# Altium PCB 1025-one.PcbDoc
Units mil, origin at the board's own origin, x right, y up, seen from the top; angles counter-clockwise.
Board outline 964.57 x 3647.49 mil, 2 copper layers (Top Layer, Bottom Layer); 26 components, 51 nets, 79 pads, 26 vias.
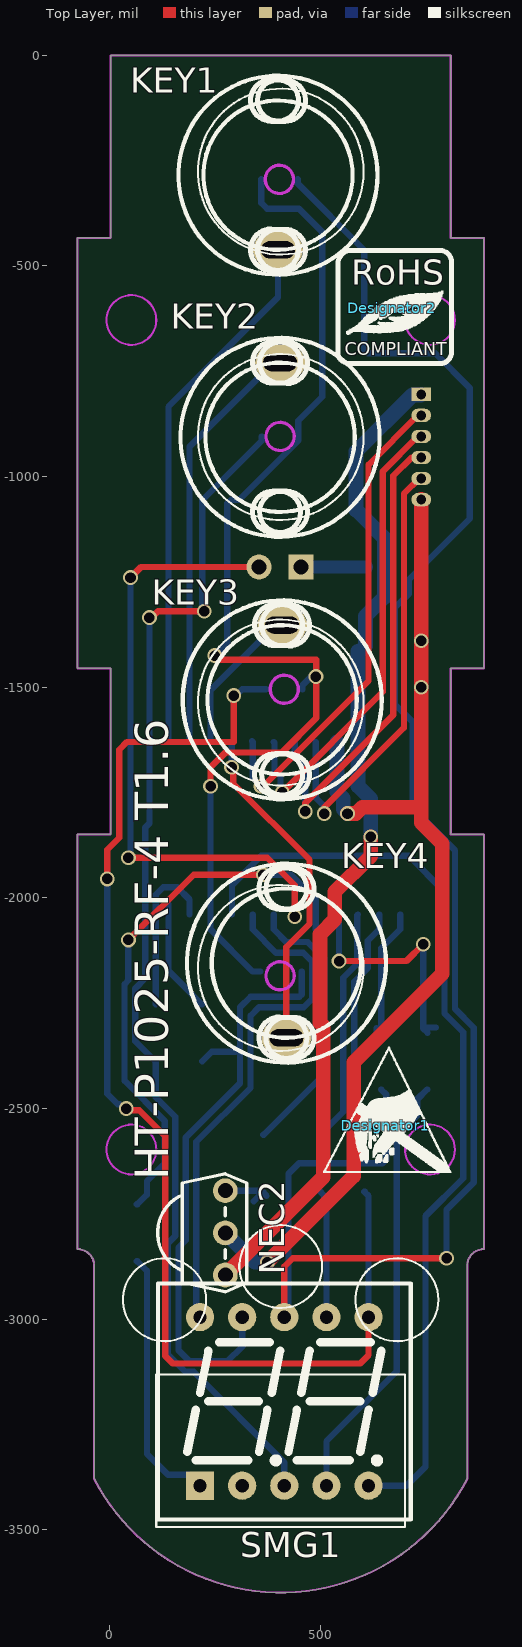
[diagram p0: Top Layer view]
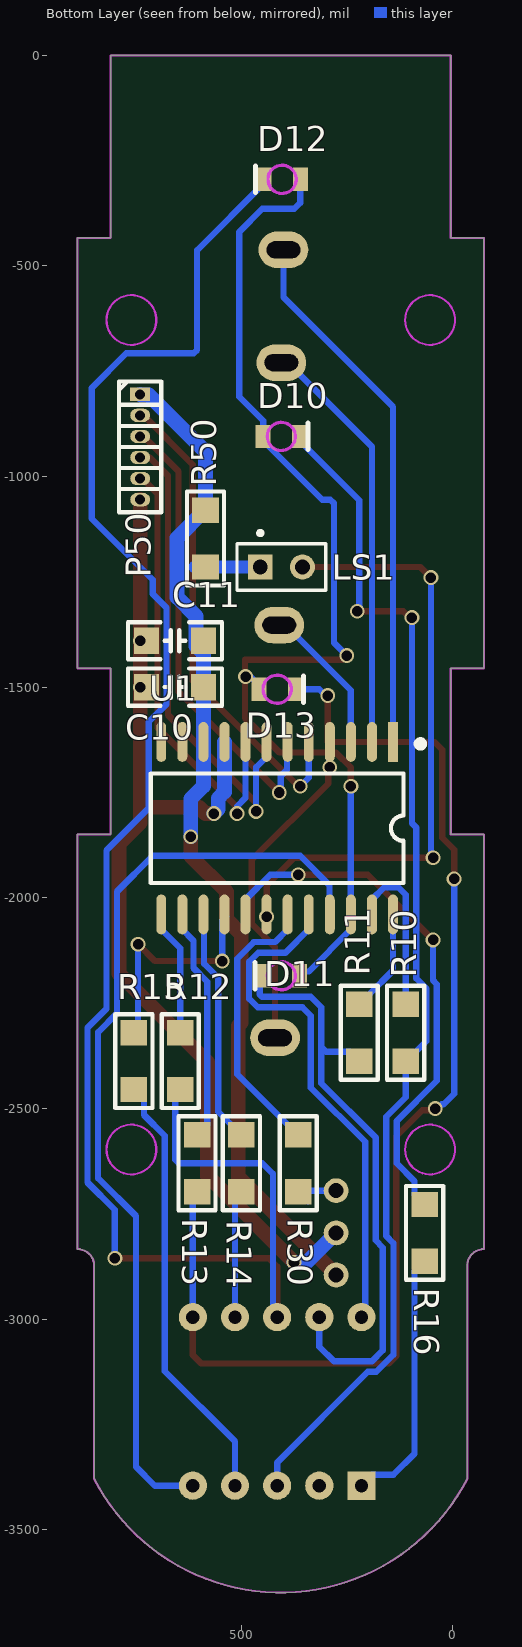
[diagram p1: Bottom Layer view, seen from below]
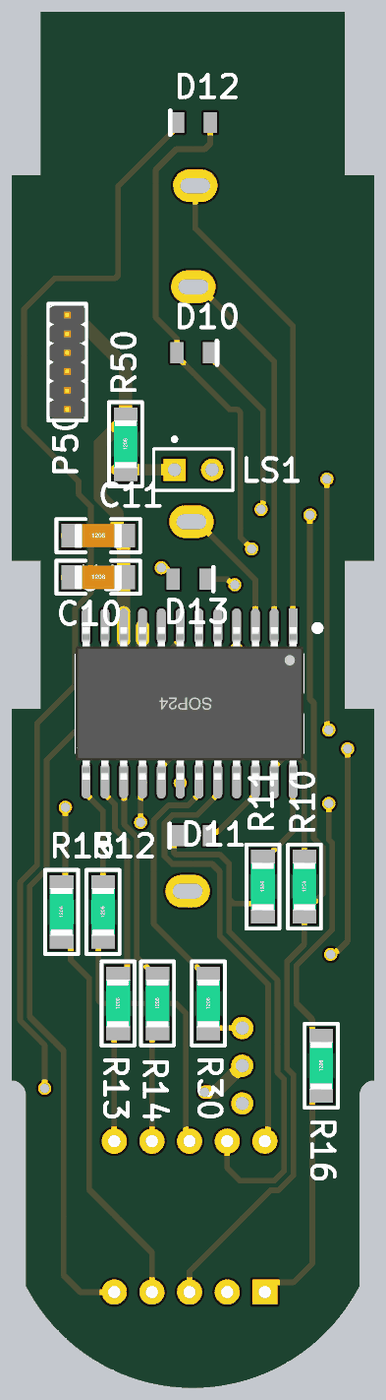
[diagram p2: 3D render of the assembled board from below, using the file's embedded part models]

## Layer stack, top to bottom
Top Solder: solder mask 0.4, Solder Resist, Dk 3.5
Top Layer: signal copper 1.4
Dielectric 1: dielectric 12.6, FR-4, Dk 4.8
Bottom Layer: signal copper 1.4
Bottom Solder: solder mask 0.4, Solder Resist, Dk 3.5

## Board outline
-36.41,-3378.37 -36.41,-2872.9 ccw(c-75.78,-2872.9) -75.78,-2833.53 -75.78,-1849.28 2.96,-1849.28 2.96,-1455.58 -75.78,-1455.58 -75.78,-434.1 2.96,-434.1 2.96,-1.03 810.05,-1.03 810.05,-434.1 888.79,-434.1 888.79,-1455.58 810.05,-1455.58 810.05,-1849.28 888.79,-1849.28 888.79,-2833.53 ccw(c888.79,-2872.9) 849.42,-2872.9 849.42,-3378.37 cw(c406.51,-3150.63)

## Design rules (kind name [scope] priority, off if disabled: settings)
Clearance [All] p1: gap=10 ignorepadtopadclearanceinfootprint=FALSE
ComponentClearance [All] p1: gap=0 collisioncheckmode=3 verticalgap=0 showdistances=FALSE
HoleSize [All] p1: absolutevalues=TRUE maxlimit=100 minlimit=12 maxpercent=80.000 minpercent=20.000
PlaneConnect [All] p1: planeconnectstyle=Direct reliefexpansion=20 reliefentries=4 reliefconductorwidth=10 reliefairgap=10
PolygonConnect [All] p1: connectstyle=Direct reliefconductorwidth=10 reliefentries=4 polygonreliefangle="90 Angle" airgapwidth=10
RoutingVias [All] p1: holewidth=28 width=50 viastyle="Through Hole" minholewidth=15 minwidth=20 maxholewidth=25 maxwidth=35
SilkToSilkClearance [All] p1: silktosilkclearance=0
SilkToSolderMaskClearance [IsPad] p1: minsilkscreentomaskgap=0 clearancetoexposedcopper=TRUE
SolderMaskExpansion [All] p1: expansion=6
Width [All] p1: maxlimit=100 minlimit=10 preferedwidth=30
25 further rules are at their usual default settings.

## Classes and differential pairs
component class 1025-A: C10 C11 D10 D11 D12 D13 KEY1 KEY2 KEY3 KEY4 LS1 NEC2 P50 R10 R11 R12 R13 R14 R15 R16 R30 R50 SMG1 U1

## Components (designator, comment, footprint, x,y, rotation, side; value= is the part's Value field where it differs from the comment)
C10 "Cap" "C 1206_M" 657.5,-1500 r180 bottom value=10uF
C11 "Cap" "C 1206_M" 657.5,-1390 r180 bottom value=0.1uF
D10 "LED0" 0805-FLED#1 405,-905 r0 bottom
D11 "LED0" 0805-FLED#2 405,-2185 r180 bottom
D12 "LED0" 0805-FLED#1 403.31,-295 r180 bottom
D13 "LED0" 0805-FLED#1 415,-1505 r0 bottom
Designator1 "Comment" ICO1 655,-2540 r0 top
Designator2 "Comment" ICO4 670,-600 r0 top
KEY1 "TOUCH" KEY-T9-2 400,-285 r180 top
KEY2 "TOUCH" KEY-T9-2 405,-907.17 r0 top
KEY3 "TOUCH" KEY-T9-2 410,-1530 r0 top
KEY4 "TOUCH" KEY-T9-2 420,-2155 r180 top
LS1 "Speaker" PIN2 455,-1215 r180 bottom
NEC2 "JSI838" HS0038B 275,-2795 r270 top
P50 "Header 6" HDR1.27-LI-6P 740,-930 r270 bottom
R10 "Res2" "R 1206-HP_M" 110,-2320 r90 bottom value=201
R11 "Res2" "R 1206-HP_M" 220,-2320 r90 bottom value=201
R12 "Res2" "R 1206-HP_M" 645,-2387.5 r90 bottom value=201
R13 "Res2" "R 1206-HP_M" 605,-2630 r90 bottom value=201
R14 "Res2" "R 1206-HP_M" 500,-2630 r90 bottom value=201
R15 "Res2" "R 1206-HP_M" 755,-2387.5 r90 bottom value=201
R16 "Res2" "R 1206-HP_M" 65,-2795 r90 bottom value=201
R30 "Res2" "R 1206-HP_M" 365,-2630 r90 bottom value=1K
R50 "Res2" "R 1206-HP_M" 585,-1147.5 r90 bottom value=4.7K
SMG1 "3621A" "SMG 0.36-2P" 415,-3195 r0 top
U1 "YX23F01CB_24" SOP24_M 415,-1834.72 r270 bottom

## Footprints (in the part's own frame and the unit in brackets; to place one, negate y for a bottom-side part, rotate by r counter-clockwise, add the part's x,y. Pads: shape width x height; smd on the part's side, far side on the other; paste and mask are expansions set on the pad)
0805-FLED#1 [mm]
  rect 0.9x1.4 smd: 1(-1.1,0) 2+(1.1,0)
  Keep-Out Layer circle w0.2: c0,0 r0.85
  silkscreen extent -1.6,-0.8 -1.6,0.8, body extent -1.02,-0.45 1.04,0.46
0805-FLED#2 [mm]
  rect 0.9x1.4 smd: 1(-1.016,0) 2+(1.1,0)
  Keep-Out Layer circle w0.2: c0,0 r0.85
  silkscreen extent -1.6,-0.8 -1.6,0.8, body extent -1.05,-0.45 1.02,0.45
"C 1206_M" [mil] "无极性贴片电容"
  rect 60x62.99 smd: 1(-67.5,0) 2(67.5,0)
  silkscreen extent -112,-44 112,44, body extent -63,-32 63,32, height 48
HDR1.27-LI-6P [mm] "直插，脚距：1.27mm"
  rect 0.8x1.2 hole 0.6: 1(-3.175,0)
  oval 0.8x1.2 hole 0.6: 2(-1.905,0) 3(-0.635,0) 4(0.635,0) 5(1.905,0) 6(3.175,0)
  silkscreen extent -3.94,-1.27 3.94,1.27, body extent -3.81,-1.2 3.81,1.2, height 4.48
HS0038B [mm] "红外接收头"
  round 1.5 hole 0.9: 1(-2.54,0) 2(0,0) 3(2.54,0)
  silkscreen extent -3.56,-4.08 3.56,1.3
ICO1 [mil] "@sucaita.com 素材塔"
  silkscreen extent -148,-111 156,187
ICO4 [mil] "@sucaita.com 素材塔"
  silkscreen extent -128,-132 142,136
KEY-T9-2 [mm]
  oval 3x2.2 hole 2.032 slot 1.016 at 90 deg: 1(0,4.5)
  silkscreen extent -6,-6 6,6
PIN2 [mm] "Photosensitive Diode; 2 Leads"
  rect 1.5x1.5 hole 0.9: 1(0,0)
  round 1.5 hole 0.9: 2(2.54,0)
  silkscreen extent -1.4,-1.4 3.94,2.17
"R 1206-HP_M" [mil] "1/4W高精度贴片电阻                    @sucaita.com 素材塔"
  rect 60x62.99 smd: 1(-67.5,0) 2(67.5,0)
  silkscreen extent -112,-44 112,44, body extent -63,-31 63,32, height 22
"SMG 0.36-2P" [mm] "15*14*7.2mm(长宽厚)"
  rect 1.7x1.7 hole 0.8: 1(-5.08,-5.08)
  round 1.7 hole 0.8: 2(-2.54,-5.08) 3(0,-5.08) 4(2.54,-5.08) 5(5.08,-5.08) 6(5.08,5.08) 7(2.54,5.08) 8(0,5.08) 9(-2.54,5.08) 10(-5.08,5.08)
  silkscreen extent -7.62,-7.11 7.62,7.11, body extent -7.5,-7 7.5,7, height 7.2
SOP24_M [mm] "15.4*10.6*2.6mm（长宽高）"
  rect 2.4x0.6 smd: 1(-5.2,6.985)
  oval 2.4x0.6 smd: 2(-5.2,5.715) 3(-5.2,4.445) 4(-5.2,3.175) 5(-5.2,1.905) 6(-5.2,0.635) 7(-5.2,-0.635) 8(-5.2,-1.905) 9(-5.2,-3.175) 10(-5.2,-4.445) 11(-5.2,-5.715) 12(-5.2,-6.985) 13(5.2,-6.985) 14(5.2,-5.715) 15(5.2,-4.445) 16(5.2,-3.175) 17(5.2,-1.905) 18(5.2,-0.635) 19(5.2,0.635) 20(5.2,1.905) 21(5.2,3.175) 22(5.2,4.445) 23(5.2,5.715) 24(5.2,6.985)
  silkscreen extent -5.23,-7.62 3.3,8.79, body extent -5.15,-7.7 5.15,7.7, height 2.7

## Part data
C10 C11: "Capacitor", LatestRevisionDate=17-Jul-2002, LatestRevisionNote="Re-released for DXP Platform.", PackageDescription="Radial Cap, Thru-Hole; 2 Leads; 0.3 in Pin Spacing", PackageReference=RAD-0.3, Published=8-Jun-2000, Publisher="Altium Limited"
D10 D11 D12 D13: "Typical INFRARED GaAs LED", LatestRevisionDate=08-Jul-2005, LatestRevisionNote="Mech Layer 1 removed.", PackageDescription="LED; 2 Leads", PackageReference=LED-0, Published=8-Jun-2000, Publisher="Altium Limited"
LS1: "Loudspeaker", LatestRevisionDate=17-Jul-2002, LatestRevisionNote="Re-released for DXP Platform.", PackageReference=PIN2, Published=24-Mar-1999, Publisher="Altium Limited"
NEC2: library part HS0038, "红外接收器"
P50: "Header, 6-Pin", LatestRevisionDate=17-Jul-2002, LatestRevisionNote="Re-released for DXP Platform.", Publisher="Altium Limited"
R10 R11 R12 R13 R14 R15 R16 R30 R50: "Resistor", LatestRevisionDate=17-Jul-2002, LatestRevisionNote="Re-released for DXP Platform.", PackageDescription="Axial Device, Thru-Hole; 2 Leads; 0.4 in Pin Spacing", PackageReference=AXIAL-0.4, Published=8-Jun-2000, Publisher="Altium Limited"
SMG1: "0.36寸2位共阴数码管"

## Via types
v1: diameter 35, hole 25, Top Layer to Bottom Layer, 26 vias

## Nets (pads, with @x,y where several pads share a name; then routed paths per layer and width w, separated by ;. In a path a pad name is that pad's centre, name@x,y a point inside that pad or via, vN(x,y) a via of type N, cw(c..) or ccw(c..) an arc to the next point about the centre after c; other vN are vias at no path point)
220VAC: 
A: R10.2 U1.23 | length 394.9
  Bottom Layer w15: R10.2 110,-1992.56 127.86,-1974.7 160.69,-1974.7 190,-2004.02 U1.23
B: R11.2 U1.24 | length 276.6
  Bottom Layer w15: U1.24@136.02,-2011.52 140,-2015.5 U1.24 140,-2172.5 196,-2228.5 196,-2230 218.5,-2252.5 R11.2
C: R12.2 U1.13 | length 318.3
  Bottom Layer w15: R12.2@633.79,-2326.36 R12.2@633.79,-2308.79 ; R12.2@646.5,-2320 R12.2 645,-2119.88 690,-2074.88 U1.13
COM1: SMG1.10 U1.20 | length 1232.2
  Bottom Layer w15: SMG1.10 206.23,-2986.23 206.23,-2579.12 335,-2450.36 335,-2280 355,-2260 461.24,-2260 481.61,-2239.62 481.61,-2151.59 460.02,-2130 395.12,-2130 340,-2074.88 U1.20
COM2: SMG1.5 U1.21 | length 2212.8
  Bottom Layer w15: U1.21 290.8,-2038.65 290.8,-1969.7 360.5,-1900 710,-1900 795,-1985 795,-2273.76 839.89,-2318.65 839.89,-2665.11 750,-2755 750,-3350 705,-3395 SMG1.5
D: R13.2 U1.14 | length 558.3
  Bottom Layer w15: R13.2 603.5,-2562.5 581,-2540 581,-2198.85 613.35,-2166.5 613.35,-2101.53 640,-2074.88 U1.14
DP/NTC: LS1.2 U1.18 | length 1479.1
  Top Layer w15: v1(45,-1905) 374.5,-1905 440,-1970.5 v1(440,-2045) ; v1(50,-1240) 75,-1215 LS1.2
  Bottom Layer w15: v1(45,-1905) 50,-1900 v1(50,-1240)
DW1: P50.2 U1.5 | length 1160.5
  Top Layer w15: v1(360,-1735) 364.85,-1735 615,-1484.85 615,-972.13 732.13,-855 P50.2
  Bottom Layer w15: U1.5@338.35,-1628.35 U1.5 340,-1715 v1(360,-1735)
DW2: P50.3 U1.6 | length 1114.6
  Top Layer w15: v1(410,-1750) 648.88,-1511.12 648.88,-988.25 732.13,-905 P50.3
  Bottom Layer w15: U1.6 391.65,-1631.65 391.65,-1696.24 406.17,-1710.76 406.17,-1746.17 v1(410,-1750)
DW3: P50.4 U1.7 | length 1142.5
  Top Layer w15: v1(465,-1795) 465,-1775 673.88,-1566.12 673.88,-998.6 717.48,-955 P50.4
  Bottom Layer w15: U1.7 440,-1665.43 465,-1690.43 v1(465,-1795)
E: R14.2 U1.15 | length 560.3
  Bottom Layer w15: R14.2 555,-2507.5 555,-2189.5 588.35,-2156.15 588.35,-2041.1 U1.15
F: R15.2 U1.16 | length 569
  Top Layer w15: v1(545,-2150) 705,-2150 v1(745,-2110)
  Bottom Layer w15: U1.16 535,-2044.45 545,-2054.45 v1(545,-2150) ; v1(745,-2110) 745,-2310 R15.2 ; R15.2@753.5,-2307.5 R15.2@775,-2307.5
G: R16.2 U1.17 | length 1303.5
  Top Layer w15: v1(45,-2100) 200,-1945 v1(365,-1945)
  Bottom Layer w15: v1(45,-2100) 45,-2195.9 36,-2204.9 36,-2434.29 131.23,-2529.52 131.23,-2630.05 89,-2672.29 89,-2705 66.5,-2727.5 R16.2 ; v1(365,-1945) 430.98,-1945 490,-2004.02 U1.17 U1.17@490,-2074.88
GND: C10.1 C11.1 NEC2.2 P50.6 U1.9 | length 2493.2
  Top Layer w35: v1(375,-2865) 580,-2660 580,-2390 790,-2180 790,-1871.65 740,-1821.65 740,-1785 ; v1(565,-1800) 585,-1800 600,-1785 740,-1785 ; P50.6 v1(740,-1390) v1(740,-1500) 740,-1785
  Bottom Layer w35: NEC2.2 345,-2865 v1(375,-2865) ; U1.9 540,-1748.64 555,-1763.64 555,-1790 v1(565,-1800)
LED_A: D10.1 R10.1 SMG1.3 | length 2859.7
  Top Layer w15: v1(95,-1335) 100.41,-1335 115.41,-1320 v1(225,-1320)
  Bottom Layer w15: v1(95,-1335) 95,-1823.21 85,-1833.21 85,-2191.26 61,-2215.25 61,-2340 108.5,-2387.5 R10.1 110,-2472.93 156.23,-2519.16 156.23,-2802.44 139.04,-2819.64 139.04,-3084.37 179.66,-3125 200,-3125 415,-3340 SMG1.3 ; v1(225,-1320) 225,-1315 220,-1310 220,-1056.54 361.69,-914.84 D10.1
LED_B: D11.1 R11.1 SMG1.9 | length 1438.3
  Bottom Layer w15: R11.1 242.5,-2365 298.79,-2365 310,-2353.79 ; SMG1.9 315,-3065 280,-3100 190.02,-3100 164.04,-3074.02 164.04,-2829.99 181.23,-2812.8 181.23,-2568.77 310,-2440 310,-2353.79 ; D11.1@456.61,-2175 456.61,-2229.27 450.88,-2235 335,-2235 310,-2260 310,-2353.79
LED_C: D12.1 R12.1 SMG1.8 | length 4275.2
  Top Layer w15: SMG1.8 415,-2875 435,-2855 v1(800,-2855)
  Bottom Layer w15: SMG1.8 425,-2985 425,-2655 450,-2630 648,-2630 656.78,-2621.21 656.78,-2466.78 R12.1 ; D12.1 446.61,-304.84 605,-463.23 605,-700 612.86,-707.86 772.86,-707.86 855,-790 855,-1100 710,-1245 710,-1279.06 677.5,-1311.56 677.5,-1540.61 719.31,-1582.43 719.31,-1786.82 820,-1887.51 820,-2263.4 864.89,-2308.29 864.89,-2675.46 800,-2740.36 v1(800,-2855)
LED_D: D13.1 R13.1 SMG1.6 | length 2892.6
  Top Layer w15: v1(-5,-1955) -5,-1885.52 22.96,-1857.56 22.96,-1648.79 41.75,-1630 295,-1630 v1(295,-1520) ; v1(40,-2500) 43.83,-2503.83 70.5,-2503.83 132.19,-2565.52 132.19,-3087.19 150,-3105 595,-3105 615,-3085 SMG1.6
  Bottom Layer w15: v1(-5,-1955) -5,-2465 20,-2490 24.59,-2490 34.59,-2500 v1(40,-2500) ; v1(295,-1520) 300,-1520 315,-1505 D13.1 ; R13.1@606.5,-2697.5 R13.1 615,-2707.5 SMG1.6
LED_DP: SMG1.2
LED_E: R14.1 SMG1.7 | length 328.9
  Bottom Layer w15: R14.1@501.5,-2697.5 R14.1 515,-2712.5 SMG1.7 524.71,-2985.29 SMG1.7@534.71,-2985.29
LED_F: R15.1 SMG1.4 | length 1040.3
  Bottom Layer w15: SMG1.4 515,-3290 681.78,-3123.22 681.78,-2564.56 731,-2515.34 731,-2477.5 753.5,-2455 R15.1
LED_G: R16.1 SMG1.1 | length 624.8
  Bottom Layer w15: R16.1 66.5,-2862.5 89,-2885 89,-3319 139.04,-3369.04 189.04,-3369.04 SMG1.1
NEC_R: R30.2 U1.19 | length 698.6
  Bottom Layer w15: R30.2 366.5,-2562.5 510,-2419 510,-2144.62 470.38,-2105 420.12,-2105 U1.19@390,-2074.88 ; U1.19@390,-2074.88 U1.19 U1.19@390,-2074.88
NetC2_1: 
NetC3_1: 
NetC5_1: 
NetC5_2: 
NetD1_K: 
NetF2_1: 
NetLS1_1: LS1.1 R50.1 | length 155
  Bottom Layer w30: LS1.1 R50.1@610,-1215
NetNEC2_1: NEC2.1 R30.1 | length 134.8
  Bottom Layer w15: NEC2.1 360.26,-2695 R30.1@372.76,-2707.5 ; R30.1@342.5,-2720 R30.1
NetP01_1: 
NetP01_2: 
NetP01_3: 
NetP01_4: 
NetQ1_3: 
NetQ2_3: 
NetQ3_3: 
NetQ4_3: 
NetR2_1: 
NetR2_2: 
TOUCH1: KEY1.1 U1.1 | length 1275.5
  Bottom Layer w15: U1.1 140,-835 400,-575 KEY1.1
TOUCH2: KEY2.1 U1.2 | length 998.3
  Bottom Layer w15: U1.2 190,-929.25 389.25,-730 KEY2.1
TOUCH3: KEY3.1 U1.3 | length 356.8
  Bottom Layer w15: U1.3 240,-1507.09 394.25,-1352.83 KEY3.1
TOUCH4: KEY4.1 U1.4 | length 801.6
  Top Layer w15: v1(290,-1690) 293.83,-1693.83 293.83,-1728.83 475,-1910 475,-2061.86 420,-2116.86 KEY4.1
  Bottom Layer w15: v1(290,-1690) U1.4
TOUCH_LED_COM: D10.2+ D11.2+ D12.2+ D13.2+ U1.22 | length 2633.1
  Top Layer w15: v1(240,-1735) 240,-1690.5 275.5,-1655 409.5,-1655 491.17,-1573.32 491.17,-1435 260,-1435 v1(250,-1425)
  Bottom Layer w15: v1(240,-1735) U1.22 240,-2074.88 340.12,-2175 D11.2+@358.41,-2175 ; v1(250,-1425) 280,-1395 280,-1063.79 288.79,-1055 308.15,-1055 448.31,-914.84 D10.2+ 448.31,-867.91 505,-811.21 505,-420 450,-365 374.12,-365 360,-350.88 D12.2+ ; D13.2+ 458.31,-1495.16 483.52,-1469.94 484.94,-1469.94 v1(489.97,-1474.97)
UART_RX: U1.12
UART_TX: U1.11
VCC: C10.2 C11.2 NEC2.3 P50.1 R50.2 U1.10 | length 2379.6
  Top Layer w35: NEC2.3 507.5,-2662.5 507.5,-2303.78 500,-2296.28 500,-2086.36 535,-2051.36 535,-1985.93 620,-1900.93 v1(620,-1855)
  Bottom Layer w35: C11.2@590,-1415 C10.2 U1.10 590,-1735 620,-1765 v1(620,-1855) ; C11.2@595,-1415 607.5,-1402.5 607.5,-1332.06 652.5,-1287.06 652.5,-1146 586.5,-1080 R50.2 585,-940.96 719.21,-806.75 738.25,-806.75 P50.1
YAOTOU: P50.5 U1.8 | length 1071.4
  Top Layer w15: v1(510,-1800) 510,-1785.5 698.88,-1596.62 698.88,-1041.23 735.11,-1005 P50.5
  Bottom Layer w15: U1.8 490,-1762.35 510,-1782.35 v1(510,-1800)

## Keep-outs
Keep-Out Layer:
  circle w5: c52.18,-2597.31 r59.06
  circle w5: c52.18,-628.8 r59.06
  circle w5: c760.84,-628.8 r59.06
  circle w5: c760.84,-2597.31 r59.06
  lines w5: -75.78,-2833.53 cw(c-75.78,-2872.9) -36.41,-2872.9 -36.41,-3378.37 ccw(c406.51,-3150.63) 849.42,-3378.37 849.42,-2872.9 cw(c888.79,-2872.9) 888.79,-2833.53 888.79,-1849.28 810.05,-1849.28 810.05,-1455.58 888.79,-1455.58 888.79,-434.1 810.05,-434.1 810.05,-1.03 2.96,-1.03 2.96,-434.1 -75.78,-434.1 -75.78,-1455.58 2.96,-1455.58 2.96,-1849.28 -75.78,-1849.28 -75.78,-2833.53

## Silkscreen, mask and mechanical layers (free items; w line width, h text height)
Top Overlay:
  circle w5: c406.51,-2875.04 r98.43
  circle w5: c130.92,-2953.78 r98.43
  circle w5: c682.1,-2953.78 r98.43
  circle w5: c406.51,-2166.38 r196.85
  circle w5: c406.51,-1536.46 r196.85
  circle w5: c406.51,-906.54 r196.85
  circle w5: c406.51,-276.62 r196.85
  lines w5: 111.23,-3493.15 701.78,-3493.15 701.78,-3130.95 111.23,-3130.95 111.23,-3493.15
  text "HT-P1025-RF-4 T1.6" at 140,-2670 h80 r90

## Text inside footprints (layer, text, board x,y; h text height)
Designator2: Top Overlay "COMPLIANT" at 558,-712.94 h30; Top Overlay "RoHS" at 574,-544.94 h60